# Altium PCB NFC.PcbDoc
Units mil, origin at the board's own origin, x right, y up, seen from the top; angles counter-clockwise.
Board outline 3105 x 630 mil, 2 copper layers (Top Layer, Bottom Layer); 37 components, 22 nets, 99 pads, 26 vias.
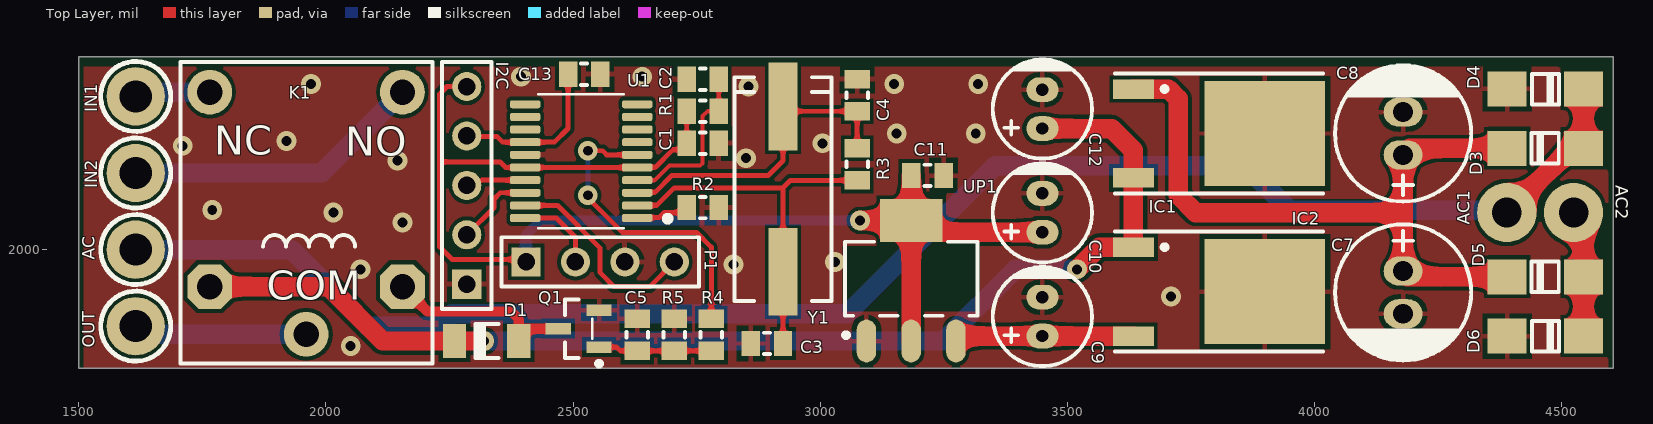
[diagram p0: Top Layer view]
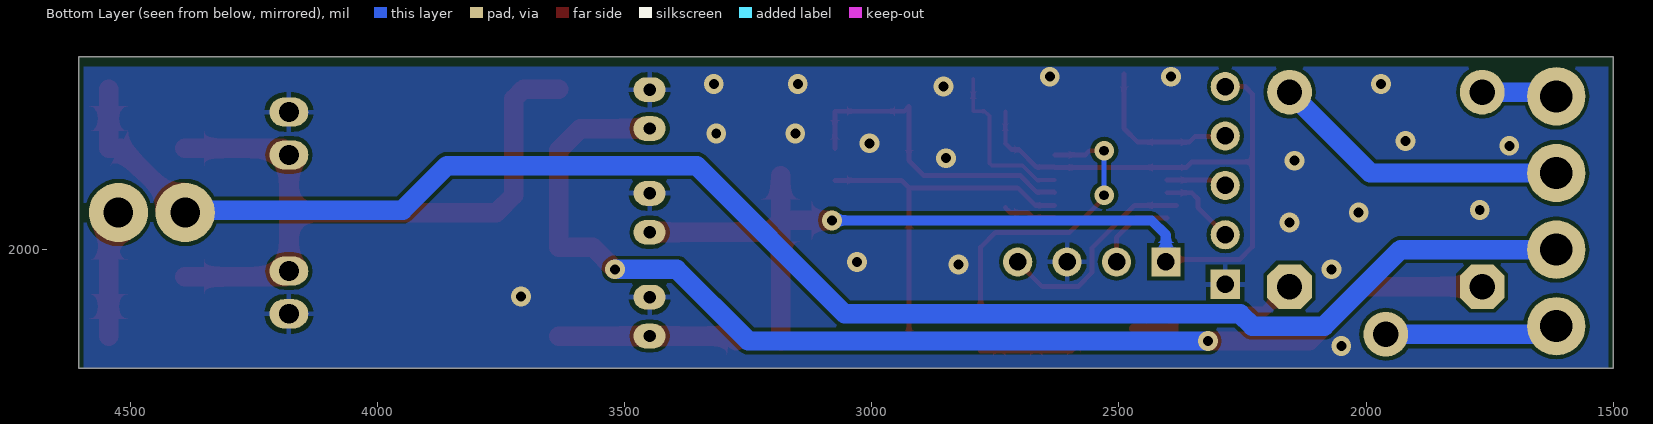
[diagram p1: Bottom Layer view, seen from below]
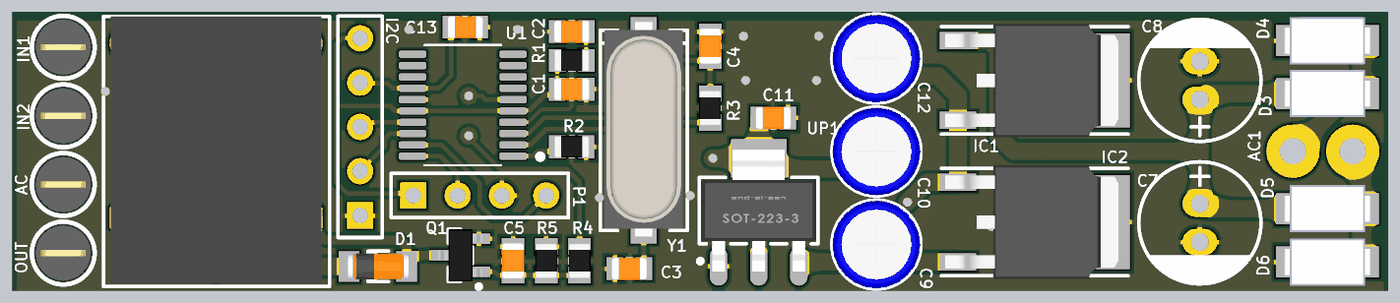
[diagram p2: 3D render of the assembled board from above, using the file's embedded part models]

## Layer stack, top to bottom
Top Solder: solder mask 0.4, Solder Resist, Dk 3.5
Top Layer: signal copper 1.4
Dielectric 1: dielectric 12.6, FR-4, Dk 4.8
Bottom Layer: signal copper 1.4
Bottom Solder: solder mask 0.4, Solder Resist, Dk 3.5

## Board outline
1500,1760 1500,2390 4605,2390 4605,1760

## Design rules (kind name [scope] priority, off if disabled: settings)
Clearance [All] p1: gap=7.87 ignorepadtopadclearanceinfootprint=FALSE except(0: Arc-Hole Track-Hole SMDPad-Hole THPad-Hole Via-Hole Fill-Hole Poly-Hole Region-Hole Text-Hole)
HoleSize [All] p1: absolutevalues=TRUE maxlimit=100 minlimit=15.75 maxpercent=80.000 minpercent=20.000
PolygonConnect [All] p1: connectstyle=Relief reliefconductorwidth=10 reliefentries=4 polygonreliefangle="90 Angle" airgapwidth=10
RoutingVias [All] p1: holewidth=15.75 width=31.5 viastyle="Through Hole" minholewidth=15.75 minwidth=31.5 maxholewidth=28 maxwidth=50
SolderMaskExpansion [All] p1: expansion=4 istentingtop=FALSE
Width [All] p1: maxlimit=39.37 minlimit=7.87 preferedwidth=10
29 further rules are at their usual default settings.

## Components (designator, comment, footprint, x,y, rotation, side; value= is the part's Value field where it differs from the comment)
AC "Test Point" "Test Point" 1615,2000 r180 top
AC1 "" "wire 2.0 mm" 4390,2075 r270 top
AC2 "" "wire 2.0 mm" 4525,2075 r0 top
C1 "100nF" SMD_CAP_0805 2795,2215 r180 top
C2 "100nF" SMD_CAP_0805 2730.04,2345 r0 top
C3 "27pF" SMD_CAP_0805 2925,1810 r180 top
C4 "27pF" SMD_CAP_0805 3075,2280 r90 top
C5 "100nF - 0805" SMD_CAP_0805 2630,1859.96 r270 top value=100pF
C7 "470uF" "cap 02" 4180,1913.31 r90 top
C8 "470uF" "cap 02" 4180,2235 r270 top
C9 "10uF" "cap 01" 3450,1864.37 r270 top
C10 "10uF" "cap 01" 3450,2074.37 r270 top
C11 "100nF" SMD_CAP_0805 3185,2150 r0 top
C12 "10uF" "cap 01" 3450,2284.37 r270 top
C13 "100nF" SMD_CAP_0805 2554.96,2355 r180 top
D1 "1N4148" LL4148 2325,1815 r180 top
D3 "1N5822" "Diode 1N4007 SMD" 4545,2205 r180 top
D4 "1N5822" "Diode 1N4007 SMD" 4390.67,2325 r0 top
D5 "1N5822" "Diode 1N4007 SMD" 4545,1945 r180 top
D6 "1N5822" "Diode 1N4007 SMD" 4390.67,1825 r0 top
I2C "Header 5" HDR1X5 2285,1930 r90 top
IC1 "L78M12" TO-252 3767.13,2235 r270 top
IC2 "L78M05" TO-252 3767.13,1915 r270 top
IN1 "Test Point" "Test Point" 1615,2310 r0 top
IN2 "Test Point" "Test Point" 1615,2155 r180 top
K1 "Relay-12V" "Relay 15.40x12.10x13.10" 1959.88,1828.54 r0 top
OUT "Test Point" "Test Point" 1615,1845 r0 top
P1 "Header 4" HDR1X4 2405,1975 r0 top
Q1 "BC817" SOT23_N 2511.34,1840 r180 top
R1 "4.7K- 0805" "RES 0805 (2012X06L)" 2730.04,2280 r0 top value=150
R2 "1K - 0805" "RES 0805 (2012X06L)" 2730,2085 r0 top value=150
R3 "1M - 0805" "RES 0805 (2012X06L)" 3075,2205 r270 top value=150
R4 "1k - 0805" "RES 0805 (2012X06L)" 2780,1795 r90 top value=150
R5 "10k- 0805" "RES 0805 (2012X06L)" 2705,1795 r90 top value=150
U1 "STM32F070F6P6" SOP65P640X120-20N 2516.61,2178.98 r180 top
UP1 "3V3" SOT223 3184.45,1940.98 r90 top
Y1 "8.0 MHz" "Crystal SMD" 2925,2144.65 r270 top

## Footprints (in the part's own frame and the unit in brackets; to place one, negate y for a bottom-side part, rotate by r counter-clockwise, add the part's x,y. Pads: shape width x height; smd on the part's side, far side on the other; paste and mask are expansions set on the pad)
"cap 01" [mil]
  oval 50x65 hole 25: 1(39.37,0) 2(-39.37,0)
  silkscreen extent -100,-100 100,100, body extent -99,-99 99,99, height 494
"cap 02" [mm]
  oval 1.5x2 hole 1.016: 1(1.1,0) 2(-1.1,0)
  silkscreen extent -3.5,-3.5 3.5,3.5
"Crystal SMD" [mm]
  rect 4.5x1.5 smd: 1(-3.683,0) 2(4.817,0)
  silkscreen extent -5.18,-2.5 6.32,2.5, body extent -5.64,-2.25 6.66,2.25, height 5.18
"Diode 1N4007 SMD" [mm] "DO-214AC 1N4001-4007"
  rect 2x1.8 smd: 1(0,0) 2(3.92,0)
  silkscreen extent 1.27,-0.81 2.67,0.83, body extent -0.54,-1.36 4.46,1.34, height 2.16
HDR1X4 [mm] "Connector; Header; 4 Position"
  rect 1.5x1.5 hole 0.9: 1(0,0)
  round 1.5 hole 0.9: 2(2.54,0) 3(5.08,0) 4(7.62,0)
  silkscreen extent -1.27,-1.27 8.89,1.27
HDR1X5 [mm] "Connector; Header; 5 Position"
  rect 1.5x1.5 hole 0.9: 1(0,0)
  round 1.5 hole 0.9: 2(2.54,0) 3(5.08,0) 4(7.62,0) 5(10.16,0)
  silkscreen extent -1.27,-1.27 11.43,1.27
LL4148 [mm] "MELF Diode, 2-Leads, Body 3.5x1.4mm, IPC Medium Density"
  rect 1.2x1.75 smd: 1(-1.65,0) 2(1.65,0)
  silkscreen extent -0.61,-0.88 0.57,0.87, body extent -1.78,-0.75 1.72,0.75, height 1.55
"Relay 15.40x12.10x13.10" [mm]
  round 2.3 hole 1.3: 1(0,0) 2(-4.95,12.45) 3(4.95,12.45)
  oct 2.3x2.3 hole 1.3: 4(-4.95,2.45) 5(4.95,2.45)
  silkscreen extent -6.45,-1.5 6.5,14, body extent -6.05,-1.3 6.05,14, height 15.6
"RES 0805 (2012X06L)" [mm] "Chip Resistor, 2-Leads, Body 2.0x1.3mm, IPC High Density _ (0.100 W)"
  rect 0.95x1.3 smd: 1(0,0) 2(1.65,0)
  silkscreen extent 0.67,-0.55 0.97,0.55, body extent -0.19,-0.63 1.84,0.64, height 0.6
SMD_CAP_0805 [mm]
  rect 0.95x1.3 smd: 1(0,0) 2(1.65,0)
  silkscreen extent 0.67,-0.55 0.97,0.55, body extent -0.19,-0.63 1.84,0.63, height 0.65
SOP65P640X120-20N [mm]
  rrect50% 1.56x0.41 smd: 1(-2.88,2.925) 2(-2.88,2.275) 3(-2.88,1.625) 4(-2.88,0.975) 5(-2.88,0.325) 6(-2.88,-0.325) 7(-2.88,-0.975) 8(-2.88,-1.625) 9(-2.88,-2.275) 10(-2.88,-2.925) 11(2.88,-2.925) 12(2.88,-2.275) 13(2.88,-1.625) 14(2.88,-0.975) 15(2.88,-0.325) 16(2.88,0.325) 17(2.88,0.975) 18(2.88,1.625) 19(2.88,2.275) 20(2.88,2.925)
  silkscreen extent -4.59,-3.45 2.2,3.45
SOT23_N [mm] "SOT23, 3-Leads, Body 2.9x1.3mm, Pitch 0.95mm, Lead Span 2.3mm, IPC Medium Density"
  rect 1.3x0.6 smd: 1(-1.05,0.95) 2(-1.05,-0.95) 3(1.05,0)
  silkscreen extent -1.18,-1.5 0.7,1.92, body extent -1.27,-1.5 1.27,1.5, height 1.1
SOT223 [mm] "SOT223, 4-Leads, Body 6.5x3.5mm, Pitch 2.30mm-Designer Abbas Basereh"
  oval 2.2x1 smd: 1(-3.2,2.3) 2(-3.2,0) 3(-3.2,-2.3)
  rect 2.2x3.2 smd: 4(3,0)
  Top Layer pour cut-out: -1.7,3.556 1.7,3.556 1.7,-3.556 -1.7,-3.556
  silkscreen extent -3.02,-3.4 1.9,3.47, body extent -3.5,-3.25 3.5,3.25, height 1.7
"Test Point" [mm]
  round 3 hole 1.651: 1(0,0)
  silkscreen extent -1.8,-1.8 1.8,1.8, body extent -1.59,-1.58 1.59,1.59, height 5.65
TO-252 [mm] "D-PAK/TO-252-AA; 3 Leads (1 Cropped); Body 10.1 (inc. leads) x 6.6 mm (LxW max)"
  rect 1x2.1 smd: 1(-2.285,-3.375) 3(2.285,-3.375)
  rect 5.4x6.2 smd: 4(0,3.375)
  silkscreen extent -3.08,-4.32 3.09,6.38, body extent -3.27,-4.11 3.27,5.83, height 2.39
"wire 2.0 mm" [mil]
  round 120 hole 60: 1(0,0)
  body extent -59,-59 59,59, height 205

## Part data
AC1 AC2: library part "Single Wire", "A Customize Component For Single Wire Connection", Color=Blue, Adding Date=1388/04/05, Company="IPA Co", Designer="Saeid Jorablo", Diameter="1.0 mm"
C1 C2 C3 C4 C11 C13: library part Cap-Bipolar, "Bipolar Capacitor", Voltage=100V, Adding Date=1387/12/20, Designer="Saeid Jorablo", Organazation=ControTec
C5: library part Cap, "Capacitor", LatestRevisionDate=17-Jul-2002, LatestRevisionNote="Re-released for DXP Platform.", PackageDescription="Radial Cap, Thru-Hole; 2 Leads; 0.3 in Pin Spacing", PackageReference=RAD-0.3, Published=8-Jun-2000, Publisher="Altium Limited"
C7 C8: library part Cap-Polar, "Polar Capacitor", Voltage=35V, Adding Date=1387/12/20, Designer="Saeid Jorablo", Organazation=ControTec
C9 C10 C12: library part Cap-Polar, "Polar Capacitor", Voltage=50V, Adding Date=1387/12/20, Designer="Saeid Jorablo", Organazation=ControTec
D1 D3 D4 D5 D6: library part "Diode 1N4148", "High Conductance Fast Diode", Code_JEDEC=DO-204-AH, ComponentLink1Description="Manufacturer Link", ComponentLink1URL=http://www.fairchildsemi.com/, ComponentLink2Description=Datasheet, ComponentLink2URL=http://www.fairchildsemi.com/ds/1N%2F1N4148.pdf, DatasheetVersion=1997, LatestRevisionDate=17-Jul-2002, LatestRevisionNote="Re-released for DXP Platform.", PackageDescription="Diode, Axial; Body 3.8 x 1.9 mm (LxDia. max), Lead Dia. 0.53 mm (max)", PackageReference=DO-35, Published=8-Jun-2000, Publisher="Altium Limited"
I2C: "Header, 5-Pin", LatestRevisionDate=17-Jul-2002, LatestRevisionNote="Re-released for DXP Platform.", Publisher="Altium Limited"
IC1: library part L78M05, "Precision 500mA Regulator"
IC2: "Precision 500mA Regulator"
K1: library part Relay, "SPDT Relay", Company=E.P.I.L, Design_Date=2011/10/31, Designer="Eng. Saeid Jorablo"
P1: "Header, 4-Pin", LatestRevisionDate=17-Jul-2002, LatestRevisionNote="Re-released for DXP Platform.", Publisher="Altium Limited"
Q1: "45 V, 500 mA NPN general-purpose transistors", ComponentLink1Description="Manufacturer Link", ComponentLink1URL=http://www.nxp.com/, ComponentLink2Description=Datasheet, ComponentLink2URL=http://www.nxp.com/, DatasheetVersion=2017, LatestRevisionDate=2017, LatestRevisionNote="IPC-7351 Footprint Added.", PackageDescription="3-Pin SOT-23 Package 0.95 mm Pitch, 2.3 mm Lead Span", PackageReference=SOT23, PackageVersion=2017-2-8, Published=2017-2-8, Publisher="Abbas Basereh"
R1 R2 R3 R4 R5: library part Res, "Resistor", LatestRevisionDate=17-Jul-2002, LatestRevisionNote="Re-released for DXP Platform.", PackageDescription="Axial Device, Thru-Hole; 2 Leads; 0.3 in Pin Spacing", PackageReference=AXIAL-0.3, Published=8-Jun-2000, Publisher="Altium Limited"
U1: "ARMÂ® CortexÂ®-M0 STM32F0 Microcontroller IC 32-Bit 48MHz 32KB _32K x 8_ FLASH 20-TSSOP", Package="TSSOP-20 STMicroelectronics", Digi-Key_Part_Number=497-17354-2-ND, Digi-Key_Purchase_URL=https://www.digikey.com/product-detail/en/stmicroelectronics/STM32F070F6P6TR/497-17354-2-ND/7313047?utm_source=snapeda&utm_medium=aggregator&utm_campaign=symbol, MF=STMicroelectronics, MP=STM32F070F6P6, SnapEDA_Link=https://www.snapeda.com/parts/STM32F070F6P6/STMicroelectronics/view-part/423630/?ref=snap
UP1: library part AMS1117-x.x, "x.x Volt, 800mA Low-Dropout Linear Regulator, 4-pin SOT-223", Data=16-12-2016, Designer="Ali Hafizi"
Y1: library part XTAL, "XTAL Crystal", Company=E.P.I.L, Design Date=11/04/2011

## Via types
v1: diameter 40, hole 20, Top Layer to Bottom Layer, tented both sides, 26 vias

## Nets (pads, with @x,y where several pads share a name; then routed paths per layer and width w, separated by ;. In a path a pad name is that pad's centre, name@x,y a point inside that pad or via, vN(x,y) a via of type N, cw(c..) or ccw(c..) an arc to the next point about the centre after c; other vN are vias at no path point)
3.3V: C1.2 C10.1 C11.1 I2C.5 P1.1 R1.1 U1.5 U1.16 UP1.2 UP1.4 | length 2588.5
  Top Layer w7.87: C1.2 R1.1
  Top Layer w10: I2C.5 2245,2330 2230,2315 2230,2177.36 ; P1.1@2400,1980 2255.4,1980 2230,2005.4 2230,2177.36 ; C1.2 2717.24,2202.2 2702.2,2202.2 2666.91,2166.91 2630.72,2166.91 U1.5 U1.16 2363.82,2166.18 2352.64,2177.36 2230,2177.36
  Top Layer w39.37: v1(3080.91,2059.09) UP1.4 ; UP1.2 UP1.4 ; C11.1 3185,2059.65 UP1.4 ; C10.1 3208.54,2035 UP1.4
  Bottom Layer w20: P1.1@2405,1985 2405,2030 2434.09,2059.09 v1(3080.91,2059.09)
+5V: C9.1 IC2.3 UP1.3 | length 363.4
  Top Layer w39.37: UP1.3 3285.04,1825.04 IC2.3
+12V: C12.1 D1.2 IC1.3 IC2.1 K1.4 | length 2391.9
  Top Layer w39.37: K1.4 2005,1925 2115,1815 D1.2 v1(2320,1815) ; C12.1 3590,2245 3634.25,2200.75 IC1.3 IC2.1 3564.96,2004.96 v1(3520,1960)
  Bottom Layer w39.37: v1(2320,1815) 3250,1815 3395,1960 v1(3520,1960)
AC1: AC1.1 AC.1 D3.1 D4.2 | length 3342
  Top Layer w39.37: AC1.1 4520,2205 D3.1 D4.2
  Bottom Layer w39.37: AC.1 1930,2000 2085,1845 2230,1845 2255,1870 3055,1870 3355,2170 3860,2170 3950,2080 4385,2080 AC1.1
AC2: AC2.1 D5.1 D6.2 | length 258.3
  Top Layer w39.37: AC2.1 4545,2055 D6.2
GND: C1.1 C2.1 C3.2 C4.2 C5.1 C7.2 C8.2 C9.2 C10.2 C11.2 C12.2 C13.1 D4.1 D6.1 I2C.1 IC1.4 IC2.4 P1.3 Q1.2 R2.2 R5.2 U1.15 UP1.1
  other v1: 2050,1805 3710,1905 2070,1960 2825,1970 3030,1975 2155,2055 2015,2075 1770,2080 2145,2180 2850,2185 1710,2210 3005,2215 1920,2220 3155,2235 3315,2235 2855,2330 1970,2335 3150,2335 3320,2335 2395,2350 2640,2350
NetC5_2: C5.2 Q1.1 R4.1 R5.1 | length 230.5
  Top Layer w10: Q1.1 2588.11,1802.6 2595.67,1795.04 C5.2 C5.2 R5.1 R4.1
NetC7_1: C7.1 C8.1 D3.2 D5.2 IC1.1 | length 1432.2
  Top Layer w39.37: IC1.1 3705.04,2324.96 3725,2305 3725,2110 3760,2075 4180,2075 ; D5.2 4188.31,1945 4180,1953.31 C7.1 C8.1 4193.31,2205 D3.2
NetD1_1: D1.1 K1.5 Q1.3 | length 369.3
  Top Layer w10: K1.5 K1.5@2155,1925 ; D1.1@2389.96,1834.96 D1.1@2395,1840
  Top Layer w20: K1.5@2155,1925 2205,1875 2375,1875 2389.96,1860.04 D1.1@2389.96,1834.96 ; D1.1@2395,1840 Q1.3
NetIN1_1: IN1.1 K1.2 | length 176.7
  Top Layer w39.37: K1.2@1748.7,2335 K1.2
  Bottom Layer w39.37: IN1.1 1623.7,2318.7 K1.2
NetIN2_1: IN2.1 K1.3 | length 607.6
  Bottom Layer w39.37: IN2.1 1991.06,2155 K1.3
NetK1_1: K1.1 OUT.1 | length 370.9
  Top Layer w39.37: K1.1@1946.34,1815 K1.1
  Bottom Layer w39.37: OUT.1 1636.31,1845 1652.76,1828.54 K1.1
NetR2_1: R2.1 U1.1 | length 108.8
  Top Layer w10: U1.1 2631.18,2065 2675,2065 2685,2075 2720,2075 R2.1
NFC_GPO: C13.2 I2C.4 U1.14 | length 331.7
  Top Layer w10: I2C.4 2286.46,2228.54 2346.46,2228.54 2357.64,2217.36 U1.14 2462.36,2217.36 2490,2245 C13.2
OSC_IN: C3.1 R3.2 U1.2 Y1.2 | length 781
  Top Layer w10: U1.2 2669.41,2089.41 2705,2125 2925,2125 ; C3.1 Y1.2 2925,2125 ; R3.2 2940.04,2140.04 2925,2125
OSC_OUT: C4.1 R3.1 U1.3 Y1.1 | length 660.6
  Top Layer w10: U1.3 2631.31,2116.31 2666.31,2116.31 2700,2150 2895.14,2150 2925,2179.86 Y1.1 2934.65,2280 C4.1 R3.1
Relay1: R4.2 U1.6 | length 620.9
  Top Layer w10: v1@2530,2101.88 v1(2530,2110) ; v1(2530,2200) 2560,2200 2568.23,2191.77 U1.6 ; v1@2535,2100 2600,2035 2750,2035 2780,2005 R4.2@2780,1869.96
  Bottom Layer w10: v1(2530,2110) v1(2530,2200)
RST: C2.2 R1.2 U1.4 | length 343.6
  Top Layer w7.87: U1.4 2665.59,2140.59 2695,2170 2757.39,2170 2762,2174.61 2762,2270 2772,2280 R1.2 C2.2
SCL: I2C.3 U1.17 | length 122.6
  Top Layer w10: I2C.3 2294.39,2139.39 2314.18,2139.39 2315.39,2140.59 U1.17
SDA: I2C.2 U1.18 | length 163.7
  Top Layer w10: I2C.2 2340,2085 2340,2102.47 2352.53,2115 U1.18
SWCLK(PA14): P1.2 U1.20 | length 157.9
  Top Layer w10: U1.20 2466.18,2063.82 2505,2025 P1.2@2505,1985
SWDIO(PA13): P1.4 U1.19 | length 438.8
  Top Layer w10: U1.19@2384.06,2089.41 2468.58,2089.41 2555,2002.99 2555,1953.21 2583.08,1925.13 2655.13,1925.13 P1.4
pads on no net: U1.7 U1.8 U1.9 U1.10 U1.11 U1.12 U1.13

## Polygon pours and split planes (outlines as drawn)
GND on Top Layer "Top Layer-GND" (solid, pour order 4): 4595,2370 4595,1760 1510,1760 1510,2370
GND on Bottom Layer "Bottom Layer-GND" (solid, pour order 6): 4595,2370 4595,1760 1510,1760 1510,2370

## Silkscreen, mask and mechanical layers (free items; w line width, h text height)
Mechanical 1:
  the board outline again, w7

## Text inside footprints (layer, text, board x,y; h text height)
K1: Top Overlay "COM" at 1879.88,1898.54 h59.06; Top Overlay "NO" at 2038.88,2189.54 h59.06; Top Overlay "NC" at 1773.88,2191.54 h59.06